# Altium PCB T1_MODIFYV2_0831.PCBDOC (part 2 of 3)
Units mm, origin at the board's own origin, x right, y up, seen from the top; angles counter-clockwise.
Board outline 155.78 x 129.36 mm, 2 copper layers (Top Layer, Bottom Layer); 121 components, 221 nets, 819 pads, 620 vias.
Unrouted connection lines stored in the file: 4.
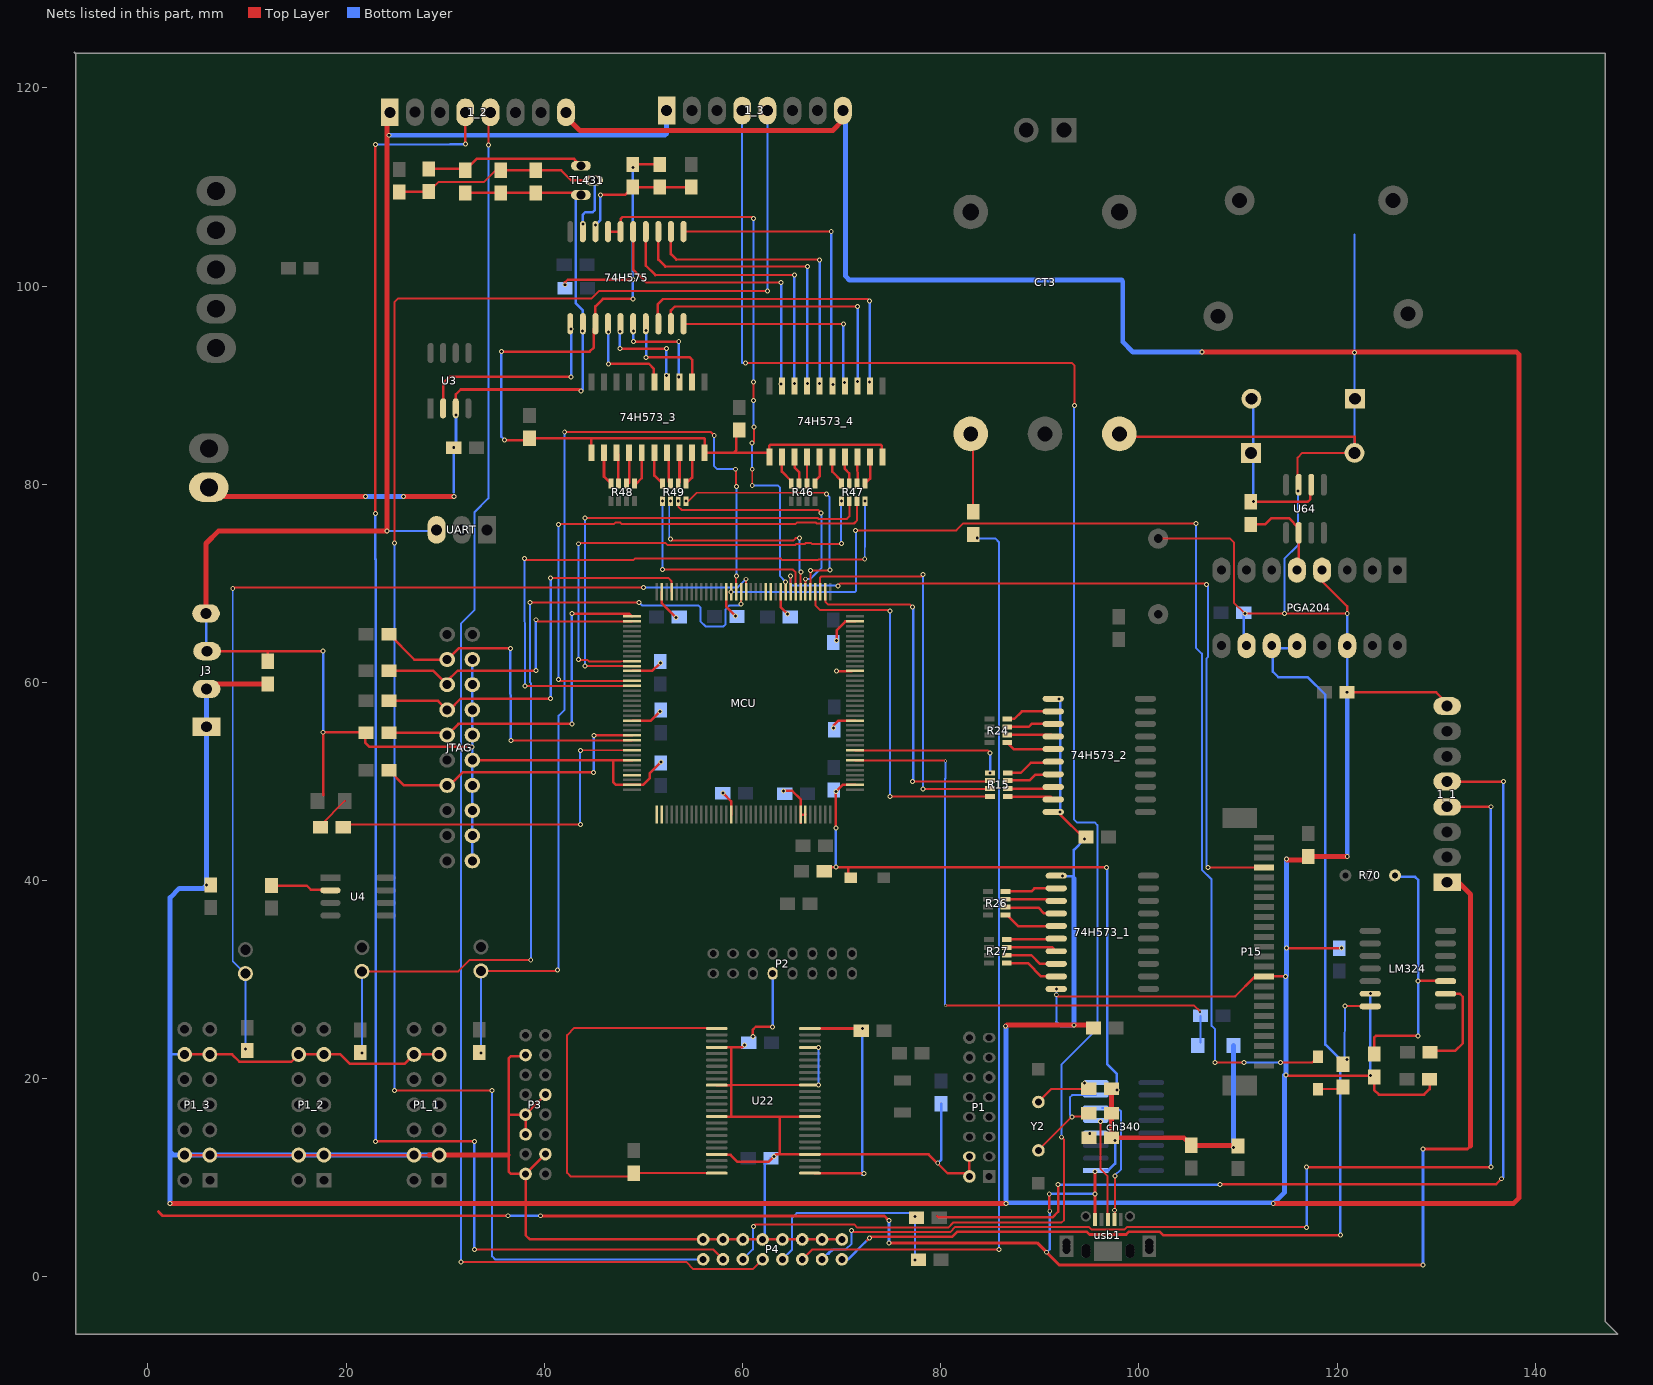
[diagram p2: the nets of this part, all layers, seen from the top]

## Via types
v1: diameter 0.5, hole 0.3, Top Layer to Bottom Layer, 606 vias
v2: diameter 0.3, hole 0.2, Top Layer to Bottom Layer, 14 vias

## Nets (pads, with @x,y where several pads share a name; then routed paths per layer and width w, separated by ;. In a path a pad name is that pad's centre, name@x,y a point inside that pad or via, vN(x,y) a via of type N, cw(c..) or ccw(c..) an arc to the next point about the centre after c; other vN are vias at no path point) (continued)
D4: MCU.118 R47.1 | length 48.4
  Top Layer w0.2: v1(43.434,62.306) 43.51,62.23 43.637,62.23 43.662,62.255 44.375,62.255 44.525,62.105 47.705,62.105 47.732,62.132 48.839,62.132 MCU.118@48.858,62.151 ; v1@43.459,74.016 43.53,74.086 52.225,74.086 52.467,73.843 52.968,73.843 52.971,73.847 65.31,73.847 65.407,73.943 66.257,73.943 66.399,74.086 66.9,74.086 67.043,73.943 69.93,73.943 v1(70.002,74.016)
  Bottom Layer w0.2: v1(43.434,62.306) 43.459,62.332 43.459,73.381 v1(43.459,73.99) ; v1(69.977,78.283) 69.952,78.257 69.952,74.066 v1(70.002,74.016)
D5: MCU.119 R47.2 | length 48.1
  Top Layer w0.2: v1(44.125,61.651) MCU.119@48.858,61.651 ; v1(44.125,76.601) 44.14,76.587 53.463,76.587 53.478,76.601 67.578,76.601 67.695,76.485 70.511,76.485 70.777,76.751 R47.2@70.777,78.283
  Bottom Layer w0.2: v1(44.125,61.651) 44.104,61.672 44.104,76.581 v1(44.125,76.601)
D6: MCU.122 R47.3 | length 55.5
  Top Layer w0.2: v1@41.427,60.151 MCU.122@48.858,60.151 ; v1(41.427,75.946) 41.451,75.97 47.02,75.97 47.17,76.12 47.67,76.12 47.82,75.97 65.333,75.97 65.483,76.12 67.418,76.12 67.507,76.031 70.282,76.031 71.256,76.031 71.577,76.352 R47.3@71.577,78.283
  Bottom Layer w0.2: v1(41.427,60.3) v1(41.427,75.946)
D7: MCU.123 R47.4 | length 64.1
  Top Layer w0.2: v1(37.998,72.492) 38.124,72.366 39.7,72.366 49.008,72.366 49.127,72.486 49.628,72.486 49.632,72.481 63.872,72.481 63.988,72.366 67.636,72.366 67.651,72.381 72.173,72.381 72.188,72.366 v1(72.339,72.441) ; v1(38.075,59.639) 43.967,59.639 48.847,59.639 MCU.123@48.858,59.651
  Bottom Layer w0.2: v1(37.998,72.492) v1(38.075,59.639) ; v1(72.339,72.441) 72.376,74.802 ; 72.377,74.676 v1(72.377,78.283)
D8: MCU.77 R49.4 | length 26.8
  Top Layer w0.2: R49.4@54.46,78.426 v1(54.318,78.283) 54.543,78.283 55.397,79.137 68.336,79.137 v1(68.478,78.994) ; v1(66.853,71.298) v1@66.858,71.298 ; MCU.77@66.858,69.151 v1@66.858,71.298 ; v1@66.858,71.374 v1@66.858,71.298 ; v1@68.809,71.298 v1@66.858,71.298
  Bottom Layer w0.2: v1(68.478,78.994) 68.758,78.715 68.758,78.181 68.758,71.399 v1(68.834,71.323)
D9: MCU.78 R49.3 | length 24.1
  Top Layer w0.2: v1(53.518,78.283) 53.518,77.74 53.864,77.394 67.64,77.394 v1(67.945,77.089) ; MCU.78@66.358,69.151 66.358,70.397 v1(66.37,70.409)
  Bottom Layer w0.2: v1(66.37,70.409) 66.818,70.409 67.369,70.96 67.99,71.581 67.99,77.044 v1(67.945,77.089)
D10: MCU.79 R49.2 | length 22.6
  Top Layer w0.2: v1(52.718,74.447) 52.864,74.301 65.122,74.301 65.37,74.549 v1(65.761,74.549) ; MCU.79@65.858,69.151 65.858,71.116 v1(65.888,71.145)
  Bottom Layer w0.2: v1(52.718,74.447) 52.609,74.556 52.609,78.174 v1(52.718,78.283) ; v1(65.761,74.549) 65.761,71.272 v1(65.888,71.145)
D11: MCU.80 R49.1 | length 22.4
  Top Layer w0.2: v1(51.918,71.374) 65.1,71.374 65.358,71.116 MCU.80@65.358,69.151
  Bottom Layer w0.2: v1(51.918,71.374) 51.918,74.625 v1(51.918,78.283)
D13: 74H575.16 74H575.17 MCU.82 | length 56.6
  Top Layer w0.2: 47.889,106.944 v1@61.112,106.944 ; v1(60.953,84.143) 61.163,84.353 v1(61.163,85.776) ; v1(60.985,79.858) v1(60.985,81.509) ; v1(61.112,88.468) v1(61.112,90.297) ; MCU.82@64.358,69.151 64.358,70.124 v1(64.364,70.129)
  Top Layer w0.254: 74H575.17@46.431,105.488 74H575.16@47.701,105.488 47.701,106.756 47.889,106.944
  Bottom Layer w0.2: v1@60.953,81.541 v1(60.953,84.143) ; v1(60.985,79.858) 63.602,79.858 63.805,79.654 63.805,70.714 v1@64.338,70.18 ; v1@61.112,85.776 v1(61.112,88.468) ; v1(61.112,90.297) v1(61.112,106.832)
D14: MCU.85
D15: MCU.86
D+: ch340.5 usb1.3 | length 9.8
  Top Layer w0.2: v1(96.114,15.697) 96.114,15.035 96.114,14.984 96.114,10.896 96.85,10.16 96.85,9.398 usb1.3@96.85,6.198
D-: ch340.6 usb1.2 | length 13.2
  Top Layer w0.2: usb1.2@97.587,5.852 v1(97.587,10.185)
  Bottom Layer w0.2: ch340.6@96.266,17.043 97.866,17.043 98.216,16.693 98.216,10.871 v1@97.536,10.191
  other v1: 97.526,6.729
DB0: 74H573_4.19 74H575.15 | length 29.6
  Top Layer w0.2: 50.292,100.355 61.697,100.355 v1(63.906,100.355)
  Top Layer w0.254: 74H575.15@48.971,105.488 48.971,101.676 50.292,100.355
  Bottom Layer w0.254: v1(63.906,90.094) 63.906,91.186 63.906,99.314 v1(63.906,100.355)
DB1: 74H573_4.18 74H575.14 | length 29.7
  Top Layer w0.2: 51.206,101.092 63.627,101.092 v1(65.227,101.092)
  Top Layer w0.254: 74H575.14@50.241,105.488 50.241,102.057 51.206,101.092
  Bottom Layer w0.254: v1(65.227,90.17) 65.227,96.723 v1(65.227,101.092)
DB2: 74H573_4.17 74H575.13 | length 30
  Top Layer w0.2: 52.222,101.956 v1(66.548,101.956)
  Top Layer w0.254: 74H575.13@51.511,105.488 51.511,102.667 52.222,101.956
  Bottom Layer w0.254: v1(66.548,90.145) 66.548,100.178 v1(66.548,101.956)
DB3: 74H573_4.16 74H575.12 | length 30
  Top Layer w0.2: 53.34,102.667 67.64,102.667 67.742,102.667 v1(67.793,102.616)
  Top Layer w0.254: 74H575.12@52.781,105.488 52.781,103.226 53.34,102.667
  Bottom Layer w0.254: v1(67.793,90.145) v1(67.793,102.616)
DB4: 74H573_4.15 74H575.11 | length 30.4
  Top Layer w0.2: 74H575.11@54.051,105.488 61.316,105.488 66.345,105.488 v1(68.959,105.488)
  Bottom Layer w0.254: v1(68.959,105.488) 68.959,90.223 v1(69.113,90.068)
DB5: 74H573_4.14 74H575.10 | length 22.1
  Top Layer w0.2: 74H575.10@54.051,96.188 v1(70.18,96.188)
  Bottom Layer w0.254: v1(70.18,96.188) 70.18,90.399 v1(70.307,90.272)
DB6: 74H573_4.13 74H575.9 | length 27.9
  Top Layer w0.2: 53.162,97.917 v1(71.628,97.917)
  Top Layer w0.254: 74H575.9@52.781,96.188 52.781,97.536 53.162,97.917
  Bottom Layer w0.254: v1(71.628,90.373) 71.628,95.91 v1(71.628,97.917)
DB7: 74H573_4.12 74H575.8 | length 31.9
  Top Layer w0.2: 51.968,98.679 72.644,98.679
  Top Layer w0.254: 74H575.8@51.511,96.188 51.46,96.239 51.46,98.171 51.968,98.679 ; 72.644,98.679 v1(72.822,98.501)
  Bottom Layer w0.254: v1(72.822,90.297) 72.822,94.818 72.822,97.434 v1(72.822,98.501)
DB8: 74H573_3.12 74H575.7 | length 9.7
  Top Layer w0.254: v1(50.267,92.786) 54.686,92.786 54.915,92.558 74H573_3.12@54.915,90.316
  Bottom Layer w0.254: v1(50.267,92.786) v1(50.267,95.529)
DB9: 74H573_3.13 74H575.6 | length 9.2
  Top Layer w0.254: v1(48.997,94.386) v1(53.569,94.386)
  Bottom Layer w0.254: v1(48.997,94.386) v1(48.997,95.453) ; v1(53.569,90.805) 53.569,93.32 53.569,93.523 53.569,93.701 v1(53.569,94.386)
DB10: 74H573_3.14 74H575.5 | length 9.2
  Top Layer w0.254: v1(47.625,93.675) 50.927,93.675 v1(52.324,93.675)
  Bottom Layer w0.254: v1(47.625,93.675) v1(47.625,95.428) ; v1(52.324,90.957) v1(52.324,93.675)
DB11: 74H573_3.15 74H575.4 | length 9.6
  Top Layer w0.254: v1(46.457,92.151) 50.546,92.151 51.029,91.669 51.029,90.316 74H573_3.15@51.029,90.087
  Bottom Layer w0.254: v1(46.457,92.151) v1(46.457,95.377)
DGND: 74H573_3.1 74H573_3.10 74H573_4.1 74H573_4.10 74H575.3 C13.2 C14.2 C39.1 C63.1 R78.1 | length 95
  Top Layer w0.254: v1(35.662,93.37) 44.577,93.37 45.009,93.802 74H575.3@45.009,95.682 ; v1(35.992,84.455) C39.1@38.481,84.455 ; C39.1@38.506,84.633 44.602,84.633 ; v1(42.088,100.127) 42.088,100.355 42.367,100.635 v1(48.971,100.635) ; 74H573_3.1@44.755,83.166 44.755,84.48 44.602,84.633 ; 74H575.3@45.161,96.188 45.161,97.942 45.923,98.704 v1(48.946,98.704) ; C14.2@48.946,112.268 C13.2@51.664,112.268 ; 58.833,83.166 60.477,83.166 61.316,83.166 62.586,83.166 62.713,83.292 62.713,83.896 62.807,83.991 73.932,83.991 74.052,83.871 74.052,82.85 74H573_4.10@74.143,82.76 ; 59.385,84.531 59.385,84.938 59.385,83.439 59.112,83.166 74H573_3.10@56.185,83.166 56.185,84.607 56.159,84.633 44.602,84.633
  Bottom Layer w0.254: v1(35.662,93.37) 35.662,84.785 v1(35.992,84.455) ; v1(48.946,98.704) v1(48.946,111.963)
EXTG5: Led1.2 MCU.90 R21.1 | length 100.4
  Top Layer w0.2: v1(8.56,69.494) 8.656,69.59 v1(50.007,69.59) ; v1(60.35,70.409) 60.358,70.401 MCU.90@60.358,69.151
  Bottom Layer w0.2: v1(8.56,69.494) 8.56,31.877 Led1.2@9.83,30.607 v1(9.83,23.012) ; v1(50.007,69.59) 59.532,69.59 v1(60.35,70.409)
EXTG6: Led2.2 MCU.91 R22.1 | length 87.7
  Top Layer w0.2: Led2.2@21.59,30.836 31.321,30.836 32.488,32.002 v1(38.632,32.002) ; v1(38.537,68.052) v1(49.575,68.052) ; v1(59.858,67.92) MCU.91@59.858,68.59
  Bottom Layer w0.2: v1(21.59,22.581) 21.59,27.534 ; 21.59,27.305 21.59,27.534 ; Led2.2@21.59,30.836 21.59,27.534 ; v1(38.537,68.052) 38.537,60.031 38.679,59.889 38.679,49.809 38.679,32.639 v1@38.679,32.049 ; v1(49.575,68.052) 49.86,67.767 55.575,67.767 ; 55.575,67.742 55.759,67.558 55.759,66.169 56.267,65.661 58.084,65.661 58.291,65.868 58.291,67.377 58.656,67.742 59.68,67.742 v1(59.858,67.92)
EXTG7: Led3.2 MCU.92 R29.1 | length 103.3
  Top Layer w0.2: Led3.2@33.604,30.886 v1@41.351,30.886 ; v1(42.062,85.268) 56.794,85.268 v1(57.15,84.912) ; MCU.92@59.358,69.151 59.358,70.661 v1(59.411,70.714) ; v1@59.36,79.807 v1@59.36,81.432
  Bottom Layer w0.2: v1(33.604,22.581) 33.604,27.94 33.604,29.82 Led3.2@33.604,30.886 ; v1@41.453,31.09 41.453,38.684 41.453,56.642 42.062,57.252 v1(42.062,85.268) ; v1(57.15,84.912) 57.15,81.813 57.455,81.509 v1(59.284,81.509) ; v1(59.411,70.714) 59.411,71.73 v1@59.411,79.756
  other v1: 41.351,30.988 59.385,79.781
EXTG8: D17.2 MCU.93 | length 119.3
  Top Layer w0.2: v1(71.425,75.336) 81.588,75.336 82.298,76.046 v1(105.789,76.046) ; v1(107.696,21.641) v1(110.617,21.641) ; v1(114.3,21.641) 117.5,21.641 D17.2@118.085,22.225
  Bottom Layer w0.2: v1(58.826,69.113) 71.349,69.113 71.45,69.215 71.45,75.311 v1(71.425,75.336) ; v1(105.789,76.046) 105.789,63.453 106.353,62.89 106.353,62.187 106.366,62.173 106.366,41.732 106.353,41.719 106.353,41.09 107.339,40.105 107.339,25.338 107.696,24.981 v1(107.696,21.641) ; v1(110.617,21.641) v1(114.3,21.641)
GND: 1_1.1 1_2.1 1_3.1 C3.1 C4.1 C5.1 C6.1 C7.1 C8.1 C9.1 C10.1 C10uf.2 C11.1 C12.1 C35.1 C36.1 C45.2 C46.2 C47.1 C48.1 ch340.1 D3.1 D5.1 J3.3 J3.4 JTAG.4 JTAG.6 JTAG.8 JTAG.10 JTAG.12 JTAG.14 JTAG.16 JTAG.18 JTAG.20 MCU.16 MCU.30 MCU.31 MCU.38 MCU.51 MCU.61 MCU.71 MCU.83 MCU.94 MCU.107 MCU.120 MCU.130 MCU.138 MCU.143 R5.1 R28.1 UART.3 usb1.5 | length 510.9
  Top Layer w0.2: 1_2.1@24.13,117.348 1_2.1@24.536,117.754
  Top Layer w0.254: J3.3@5.969,63.144 12.116,63.144 ; R28.1@12.116,62.154 12.116,63.144 ; 17.678,48.625 v1(17.678,54.966) R5.1@21.971,54.966 ; v1(17.678,63.144) 12.116,63.144 ; R5.1@21.946,55.143 21.946,53.899 22.352,53.492 v1(32.715,53.492) ; JTAG.12@32.741,52.146 32.745,52.151 MCU.138@48.858,52.151 ; 46.939,52.151 46.939,49.962 47.244,49.657 ; 47.263,49.651 49.956,49.651 50.648,50.343 50.648,50.851 v1(51.765,51.968) ; MCU.130@48.858,56.151 50.766,56.151 v1(51.689,57.074) ; MCU.120@48.858,61.151 50.889,61.151 v1(51.714,61.976) ; MCU.107@51.858,69.151 51.858,67.979 v1(53.289,66.548) ; v1(58.014,48.819) 58.039,48.819 58.857,48.001 ; MCU.94@58.358,69.151 58.358,67.651 v1(59.309,66.7) ; MCU.16@58.858,46.651 58.858,47.974 ; MCU.83@63.858,69.151 63.858,67.587 v1(64.541,66.904) ; v1(64.16,49.047) 65.024,49.047 65.858,48.213 MCU.30@65.858,45.847 ; MCU.30@65.858,46.651 MCU.31@66.358,46.651 ; C12.1@68.326,41.326 70.663,41.326 ; v1(69.19,55.397) 69.19,55.651 69.689,56.151 MCU.51@71.358,56.151 ; v1(69.418,45.314) v1(69.418,48.971) 70.098,49.651 MCU.38@71.358,49.651 ; v1(69.469,61.138) MCU.61@71.044,61.138 ; v1(69.494,64.237) 69.494,65.253 70.393,66.151 MCU.71@71.358,66.151 ; D5.1@70.663,40.259 70.663,41.326 ; v1(90.957,8.382) 90.957,6.68 v1(91.008,6.629) ; usb1.5@95.576,5.791 usb1.5@95.645,5.722 ; usb1.5@95.576,6.071 v1(95.576,8.382) v1(95.576,10.622) ; v1(96.749,41.326) 70.663,41.326 ; 1_1.1@131.445,39.776 1_1.1@132.309,39.776
  Top Layer w0.3: 1.067,6.579 1.469,6.177 v1@36.271,6.172 ; v1@39.624,6.147 74.32,6.147 v1(74.765,5.702) ; v1(74.765,3.442) 89.742,3.442 91.997,1.187 v1(128.67,1.187) ; v1(128.67,12.91) 133.179,12.91 133.477,13.208
  Top Layer w0.5: J3.4@5.867,66.954 5.867,74.016 7.137,75.286 v1(24.13,75.286) 24.13,82.017 1_2.1@24.13,117.348 ; C47.1@97.231,18.974 97.257,18.948 C46.2@97.257,14.046 104.546,14.046 C45.2@105.308,13.284 C10uf.2@109.931,13.284 ; 1_1.1@132.309,39.776 133.477,38.608 133.477,13.208
  Bottom Layer w0.2: v1@24.36,75.286 25.629,75.286 UART.3@29.032,75.286 ; 1_3.1@52.349,117.704 1_3.1@52.349,117.958
  Bottom Layer w0.254: J3.3@5.867,63.246 J3.4@5.867,66.954 ; v1(17.678,54.966) v1(17.678,63.144) ; JTAG.20@32.741,41.986 JTAG.4@32.741,62.306 ; v1(69.418,41.351) v1(69.418,45.314) ; v1(90.703,2.489) 91.008,2.794 v1(91.008,6.629) ; v1(90.957,8.382) v1(95.576,8.382) ; ch340.1@96.545,10.77 96.952,10.77 97.612,11.43 v1(97.612,13.767) ; v1@96.799,41.326 96.799,21.488 97.79,20.498 v1(97.79,18.872)
  Bottom Layer w0.3: v1(36.322,6.172) v1(39.599,6.172) ; v1(74.765,3.442) v1(74.765,5.702) ; v1(128.67,1.187) v1(128.67,12.91)
  Bottom Layer w0.5: v1(24.308,115.214) 42.113,115.214 52.172,115.214 52.349,115.392 1_3.1@52.349,117.704 ; v1(109.55,13.081) D3.1@109.55,23.368
GND_D1: 1_1.8 1_2.8 1_3.8 74H573_1.1 74H573_1.10 74H573_2.1 74H573_2.10 74H575.2 "Sing GND.1" C15.2 C16.2 C17.1 C33.1 C34.1 C37.2 C38.2 C40.1 C41.1 C49.1 C50.1 C51.2 CT3.1 D8.2 D9.1 J3.1 J3.2 LM324.13 P1.2 P1.4 P1_1.3 P1_1.4 P1_1.11 P1_1.12 P1_2.3 P1_2.4 P1_2.11 P1_2.12 P1_3.3 P1_3.4 P1_3.11 P1_3.12 P2.26 P3.35 P3.40 P3.41 P3.43 P3.46 P3.47 P4.50 P4.52 P4.54 P4.56 P4.58 P4.60 P4.62 P4.64 P15.15 PGA204.4 PGA204.10 PGA204.14 R28.2 R40.1 R71.2 R75.2 Rr15.2 TL431.3 U3.3 U22.4 U22.10 U22.15 U22.21 U22.28 U22.34 U22.39 U22.45 U64.3 | length 1026.2
  Top Layer w0.2: 58.89,19.296 58.949,19.355 U22.15@66.37,19.355 ; v1@91.821,28.321 109.728,28.321 ; 101.956,74.498 109.22,74.498 109.599,74.119 109.599,68.045 110.69,66.954 v1(110.719,66.954) 114.071,66.954 ; 114.071,66.929 v1@121.006,66.929 ; U64.3@116.027,80.493 116.027,82.677 116.51,83.16 D9.1@121.765,83.16
  Top Layer w0.254: P1_3.4@3.708,12.294 28.346,12.294 ; P1_3.12@3.708,22.454 8.504,22.454 9.24,21.717 14.478,21.717 P1_2.12@15.215,22.454 19.431,22.454 20.396,21.488 25.883,21.488 P1_1.12@26.848,22.454 P1_1.11@29.388,22.454 ; U3.3@31.064,87.655 31.064,89.052 31.568,89.556 40.462,89.556 43.54,89.556 v1(43.688,89.408) ; R75.2@32.029,109.398 C16.2@35.585,109.398 C15.2@39.141,109.398 43.488,109.398 TL431.3@43.688,109.198 ; 36.398,16.434 36.444,16.388 P3.41@38.11,16.388 P3.40@40.11,18.388 ; P3.43@38.11,14.388 P3.41@38.11,16.388 ; P3.35@38.11,22.388 37.998,22.276 36.652,22.276 36.398,22.022 36.398,10.643 36.653,10.388 P3.47@38.11,10.388 ; P3.46@40.11,12.388 P3.47@38.11,10.388 38.11,7.391 38.11,4.207 38.538,3.778 P4.50@56.032,3.778 P4.52@58.032,3.778 P4.54@60.032,3.778 P4.56@62.032,3.778 P4.58@64.032,3.778 P4.60@66.032,3.778 P4.62@68.032,3.778 P4.64@70.032,3.778 ; U22.39@57.404,16.18 58.826,16.18 U22.10@66.802,16.18 ; U22.34@57.404,19.355 58.852,19.355 58.89,19.317 58.89,16.243 ; U22.28@57.404,23.165 59.969,23.165 v1(60.198,23.393) ; U22.45@58.115,12.319 58.801,12.319 59.512,11.608 62.611,11.608 63.373,12.37 78.791,12.37 80.696,10.465 82.57,10.465 P1.2@82.896,10.138 P1.4@82.896,12.138 ; 58.89,19.296 58.89,23.165 ; v1(61.062,24.257) 61.052,24.267 61.052,24.959 61.337,25.244 v1(63.048,25.242) v1(63.048,25.242) ; 63.754,12.37 63.754,16.154 64.262,16.18 ; 74H573_2.10@91.338,46.787 91.948,46.787 v1(94.539,44.196) ; v1(91.667,28.475) v1@91.821,28.321 ; CT3.1@98.388,84.768 121.765,84.768 121.765,84.252 D9.1@121.765,83.16 ; 109.728,28.321 P15.15@111.684,30.277 ; P15.15@112.632,30.319 v1(114.808,30.319) ; v1(114.884,33.172) v1(120.447,33.172) ; v1@114.96,20.32 123.647,20.32 R71.2@123.673,20.295 ; PGA204.4@118.491,71.323 118.491,70.206 121.031,67.666 v1(121.031,66.929) ; v1(121.006,59.004) 129.997,59.004 1_1.8@131.445,57.556 ; C33.1@121.006,59.233 C33.1@121.183,59.055 ; R71.2@123.749,20.193 123.749,18.872 124.231,18.39 128.778,18.39 129.337,18.948 C50.1@129.337,19.939
  Top Layer w0.3: CT3.1@98.247,84.909 CT3.1@98.388,84.768
  Top Layer w0.5: v1(2.235,7.391) 7.366,7.391 8.433,7.391 38.11,7.391 v1(86.614,7.391) ; J3.2@5.918,59.334 6.426,59.842 R28.2@12.09,59.842 ; 6.147,79.68 7.061,78.765 16.993,78.765 ; 17.28,78.765 16.993,78.765 ; v1(21.971,78.765) 16.993,78.765 ; v1(25.806,78.765) v1(30.886,78.765) ; 28.346,12.319 36.347,12.319 ; 1_2.8@42.189,117.526 42.189,117.094 43.586,115.697 69.113,115.697 70.129,116.713 1_3.8@70.129,117.704 ; v1(86.563,25.298) 86.69,25.425 C41.1@95.123,25.425 ; v1(106.375,93.32) 138.125,93.32 138.379,93.066 138.379,7.976 137.795,7.391 v1(113.563,7.391) ; v1@114.96,42.088 C51.2@117.094,42.088 ; C51.2@117.094,42.443 v1(121.031,42.443)
  Bottom Layer w0.2: v1(67.666,19.355) v1(67.666,23.165) ; 91.667,25.757 v1(91.667,28.475) v1@91.667,28.903 ; v1(114.681,66.954) 114.681,72.466 116.078,73.863 v1(116.078,79.299) ; D9.1@121.765,83.16 v1(121.765,93.294) 121.765,105.207
  Bottom Layer w0.254: 2.235,22.581 2.362,22.454 P1_3.12@3.708,22.454 ; 30.861,79.172 v1(30.861,83.693) 31.09,83.922 v1(31.09,86.995) ; v1(43.688,89.408) 43.866,89.586 v1(43.866,95.479) 43.866,97.561 43.155,98.273 43.155,108.664 43.659,109.169 TL431.3@43.688,109.198 ; P4.56@62.032,3.778 62.23,3.976 62.23,5.156 62.23,8.128 62.23,11.328 C37.2@62.865,11.963 ; v1(63.048,25.242) P2.26@63.048,30.627 ; v1(79.705,11.481) 80.035,11.811 R40.1@80.035,17.475 ; 91.667,25.757 92.126,25.298 v1@93.447,25.298 ; v1(91.923,58.344) 92.05,58.217 92.05,46.965 v1(92.024,46.939) ; v1@92.329,40.411 93.243,40.411 93.447,40.208 93.447,43.104 v1(94.539,44.196) ; C34.1@110.592,67.005 110.592,63.983 PGA204.10@110.871,63.703 ; C49.1@120.244,33.172 v1(120.447,33.172) ; 121.031,58.725 PGA204.14@121.031,63.703 v1(121.031,66.929) ; v1(123.368,20.32) v1(123.368,28.6)
  Bottom Layer w0.3: 1_3.8@70.129,117.704 1_3.8@70.129,117.958 ; v1@114.681,20.396 v1@114.859,20.574
  Bottom Layer w0.5: v1(2.235,7.391) 2.235,12.649 ; 2.235,21.133 2.235,21.768 ; J3.2@5.918,59.334 J3.1@5.918,55.524 v1(5.918,39.548) 5.588,39.218 3.175,39.218 2.235,38.278 2.235,22.581 2.235,21.768 ; v1(21.971,78.765) v1(25.806,78.765) ; P1_1.3@29.388,12.294 P1_1.4@26.848,12.294 P1_2.3@17.755,12.294 P1_2.4@15.215,12.294 P1_3.3@6.248,12.294 P1_3.4@3.708,12.294 2.591,12.294 2.235,12.649 ; 1_3.8@70.129,117.704 70.409,117.424 70.409,100.99 70.79,100.609 98.247,100.609 98.374,100.482 98.374,94.361 99.416,93.32 v1(106.375,93.32) ; v1@86.604,25.258 v1(86.614,7.391) 86.706,7.483 113.472,7.483 v1(113.563,7.391) 114.681,8.509 v1@114.681,20.371 ; v1(93.447,25.4) 93.447,40.208 ; v1@114.859,20.574 v1@114.859,30.319 ; v1@114.884,30.395 v1(114.884,33.172) v1(114.884,42.164) ; v1(121.031,42.443) 121.031,58.725 ; 2.235,12.649 2.235,14.929 2.235,19.488 2.235,21.768
  other v1: 63.17,12.167 114.859,20.371 91.667,29.058 92.278,40.462
GPB13: MCU.74 R15.2 | length 35.5
  Top Layer w0.2: MCU.74@68.358,69.151 68.358,68.116 68.605,67.869 76.886,67.869 v1(77.165,67.589) ; v1(77.165,50.013) R15.2@84.925,50.013
  Top Layer w0.254: R15.2@84.925,50.013 R15.2@84.988,50.076
  Bottom Layer w0.254: v1(77.165,50.013) 77.212,50.059 77.212,67.543 v1(77.165,67.589)
GPB14: MCU.75 R15.3 | length 40.3
  Top Layer w0.2: MCU.75@67.858,69.151 67.839,69.17 67.839,70.582 67.964,70.707 70.314,70.707 ; 70.381,70.707 78.073,70.707 v1(78.232,70.866) ; v1(78.232,49.225) 84.937,49.225 R15.3@84.988,49.276
  Bottom Layer w0.2: v1(78.232,49.225) 78.232,56.159 78.232,56.54 78.232,69.571 v1(78.232,70.866)
GPB15: MCU.76 R15.4 | length 38
  Top Layer w0.2: MCU.76@67.358,69.151 67.358,67.77 67.818,67.31 74.803,67.31 v1(74.905,67.208) ; v1@74.905,48.476 R15.4@84.988,48.476
  Bottom Layer w0.2: v1(74.905,48.463) 74.905,53.442 74.905,54.839 74.905,55.626 v1(74.905,67.208)
GPC5: MCU.45 R15.1 | length 15.7
  Top Layer w0.2: MCU.45@71.358,53.151 71.377,53.132 84.739,53.132 v1(84.988,52.883)
  Bottom Layer w0.254: v1(84.988,50.876) v1(84.988,52.883)
GPE0: MCU.141
GPE2: MCU.1
GPE3: MCU.2
IN1_2: P4.59
IN1_3: 1_2.4 P4.51 | length 159.8
  Top Layer w0.2: v1@32.94,2.767 35.484,2.767 57.043,2.767 P4.51@58.032,1.778
  Top Layer w0.254: v1(22.962,77.038) v1(22.962,114.275) ; v1(22.983,13.687) v1(32.94,13.687) ; v1(32.029,114.325) 32.029,115.799 1_2.4@32.029,117.526
  Bottom Layer w0.2: P4.51@58.032,1.778 P4.51@58.522,1.778
  Bottom Layer w0.254: v1@22.962,13.665 v1(22.983,13.687) 22.983,72.419 22.962,72.441 v1(22.962,77.038) ; v1(22.962,114.275) 30.528,114.317 v1(32.029,114.325) ; v1(32.94,2.769) 32.94,8.001 v1(32.94,13.687)
IN1_4: 1_2.5 P4.55 | length 148.4
  Top Layer w0.2: v1(31.599,1.526) 54.307,1.526 55.043,0.789 61.043,0.789 P4.55@62.032,1.778 ; v1(34.366,114.224) 34.366,117.323 1_2.5@34.569,117.526
  Bottom Layer w0.2: v1(31.599,1.526) 31.599,22.428 31.599,65.95 32.945,67.296 32.945,77.141 34.366,78.562 v1(34.366,114.224)
IN1_5: 1_3.4 P4.53 | length 184.5
  Top Layer w0.2: v1(60.3,92.253) 93.243,92.253 93.497,91.999 v1@93.497,88.011 ; v1(61.112,5.105) 61.313,5.306 71.272,5.306 71.598,4.98 72.369,4.98 72.384,4.995 73.26,4.995 73.275,4.98 80.766,4.98 81.293,5.507 92.217,5.507 92.45,5.74 92.45,13.849 v1(92.202,14.097)
  Bottom Layer w0.2: 1_3.4@59.969,117.704 59.969,108.433 59.969,92.253 v1(60.3,92.253) ; P4.53@60.032,1.778 61.043,2.789 61.043,5.036 v1(61.112,5.105) ; v1(92.202,14.097) 92.202,21.447 95.809,25.054 95.809,45.593 95.529,45.872 93.751,45.872 93.447,46.177 v1@93.447,87.935
  other v1: 93.497,87.935
IN1_6: 1_3.5 P4.49 | length 185.6
  Top Layer w0.2: v1(24.867,18.821) 24.878,18.81 v1(34.734,18.81) ; v1(24.867,74.066) 24.867,82.321 ; 24.867,80.594 24.867,82.321 ; v1(62.509,99.517) 45.548,99.517 44.786,98.755 25.248,98.755 24.867,98.374 24.867,82.321
  Bottom Layer w0.2: v1(24.867,18.821) v1(24.867,74.066) ; v1(34.734,18.81) 34.734,16.002 34.734,2.071 35.027,1.778 P4.49@56.032,1.778 ; v1(62.509,99.517) 1_3.5@62.509,117.704
IN1_7: 1_1.4 P4.61 | length 117.6
  Top Layer w0.2: v1@71.021,4.735 71.231,4.526 72.557,4.526 72.572,4.541 73.072,4.541 73.087,4.526 75.286,4.526 80.954,4.526 81.481,5.053 94.938,5.053 95.229,4.762 98.522,4.762 98.813,5.053 116.892,5.053 v1(116.942,5.004)
  Top Layer w0.254: v1(116.942,11.074) v1(135.534,11.074) ; 1_1.4@131.115,47.447 v1(135.534,47.447)
  Bottom Layer w0.2: P4.61@68.032,1.778 68.573,2.319 ; 69.043,2.789 68.573,2.319 ; v1(71.021,4.702) 71.021,3.368 70.442,2.789 69.196,2.789 68.726,2.319 68.573,2.319
  Bottom Layer w0.254: v1(116.942,5.004) v1(116.942,11.074) ; v1(135.534,11.074) 135.534,12.116 v1(135.534,47.447)
IN1_8: P4.57 Sing.2 V_8.2 | length 21.9
  Bottom Layer w0.2: P4.57@64.032,1.778 65.021,2.767 65.021,5.992 65.456,6.426 77.419,6.426 v1(77.419,1.727)
  other v1: 77.419,6.096
IN_8: 1_1.5 | length 106.1
  Top Layer w0.254: 79.654,6.147 79.803,5.998 91.27,5.998 91.846,6.575 v1(91.846,9.322) ; v1@108.128,9.373 136.068,9.373 v1(136.601,9.906) ; 1_1.5@131.115,49.987 v1(136.779,49.987)
  Bottom Layer w0.254: v1(91.846,9.322) v1(108.179,9.322) ; v1(136.601,9.906) 136.779,10.084 v1(136.779,49.987)
IN_CHA: P4.63 PGA204.11 PGA204.12 | length 118.9
  Top Layer w0.254: P4.63@69.799,1.778 P4.63@70.032,1.778 ; 72.568,3.683 72.93,4.045 81.154,4.045 81.681,4.572 94.739,4.572 95.03,4.281 98.721,4.281 99.012,4.572 102.095,4.572 102.451,4.216 v1(120.345,4.216)
  Bottom Layer w0.254: P4.63@70.032,1.778 70.663,1.778 72.39,3.505 v1(72.822,3.937) ; 114.249,60.503 117.069,60.503 118.821,58.75 118.821,23.45 120.345,21.926 v1(120.345,4.216) ; 114.275,60.528 114.071,60.528 113.513,61.087 113.513,63.449 PGA204.12@116.18,63.449
IN_IA1: PGA204.5 R16.2 U64.6 | length 9.6
  Top Layer w0.254: R16.2@111.305,75.946 112.751,75.946 113.381,76.577 115.141,76.577 116.129,75.589 U64.6@116.129,75.096 ; PGA204.5@116.129,71.145 U64.6@116.129,74.727
IN_IB: R13.2 | length 94
  Top Layer w0.2: 66.032,1.778 67.023,2.769 v1(85.885,2.769)
  Bottom Layer w0.2: v1(83.693,74.574) 83.769,74.498 85.547,74.498 85.885,74.16 v1(85.885,2.769)
JTCK: JTAG.9 MCU.109 R5.2 | length 36.4
  Top Layer w0.254: R5.2@24.308,54.915 29.972,54.915 JTAG.9@30.201,54.686 31.332,55.817 v1(42.787,55.817) v1@42.824,55.855 ; v1(42.787,66.941) 48.568,66.941 MCU.109@48.858,66.651
  Bottom Layer w0.254: v1(42.787,55.817) 42.787,56.794 42.787,63.119 42.787,65.253 v1(42.787,66.941)
JTDI: JTAG.5 MCU.110 R4.2 | length 31.1
  Top Layer w0.2: v1@39.279,66.192 39.313,66.158 48.851,66.158 MCU.110@48.858,66.151
  Top Layer w0.254: R4.2@24.308,61.163 28.804,61.163 JTAG.5@30.201,59.766 30.201,60.122 31.254,61.175 39.103,61.175 v1(39.141,61.214) ; v1(39.141,66.319) 39.152,66.319 v1@39.279,66.192
  Bottom Layer w0.254: v1(39.141,61.214) 39.12,61.235 39.12,66.298 v1(39.141,66.319)
JTDO: JTAG.13 MCU.133 R7.2 | length 29.5
  Top Layer w0.254: R7.2@24.308,51.13 25.832,49.606 JTAG.13@30.201,49.606 30.441,49.606 31.787,50.952 44.933,50.952 v1(44.958,50.927) ; v1@45.019,54.651 MCU.133@48.858,54.651
  Bottom Layer w0.254: v1(44.958,50.927) 44.983,50.927 45.009,50.952 45.009,52.553 v1(45.009,54.661)
JTMS: JTAG.7 MCU.105 R6.2 | length 42.8
  Top Layer w0.2: v1(40.628,70.536) 48.057,70.536 52.501,70.536 52.858,70.178 MCU.105@52.858,69.151
  Top Layer w0.254: R6.2@24.308,58.141 29.286,58.141 JTAG.7@30.201,57.226 30.441,57.226 31.572,58.357 v1(40.628,58.357)
  Bottom Layer w0.254: v1(40.628,58.357) 40.628,63.322 40.628,63.602 v1(40.628,70.536)
JTRST: JTAG.3 MCU.134 R3.2 | length 35.3
  Top Layer w0.2: v1@36.627,54.151 MCU.134@48.858,54.151
  Top Layer w0.254: R3.2@24.308,64.872 26.873,62.306 30.226,62.306 31.357,63.437 v1(36.576,63.424)
  Bottom Layer w0.254: v1(36.576,63.424) v1(36.627,54.127)
LCS: MCU.81 P15.4 | length 79.1
  Top Layer w0.2: MCU.81@64.858,69.151 v1(64.858,70.752) ; v1@69.748,69.748 v1(69.621,69.748) 69.87,69.997 106.686,69.997 v1(106.807,69.875) ; v1(106.978,41.319) P15.4@112.632,41.319
  Bottom Layer w0.2: v1(64.858,70.752) 64.858,69.94 64.999,69.799 v1@69.621,69.799 ; v1(106.807,69.875) 106.97,69.712 106.97,62.538 106.807,62.375 106.82,62.362 106.82,41.544 106.807,41.531 106.807,41.49 v1(106.978,41.319)
MOSI: D3.2 MCU.43 R50.2 | length 62.5
  Top Layer w0.2: MCU.43@71.358,52.151 71.377,52.132 v2@80.467,52.132 ; v2(80.493,27.407) 84.176,27.407 105.562,27.407 106.172,26.797 v2(106.172,26.746)
  Bottom Layer w0.2: v2(80.467,52.07) 80.512,52.025 80.512,50.349 80.451,50.288 80.451,27.449 v2(80.493,27.407) ; D3.2@106.223,23.641 R50.2@106.223,26.34
Net74H573_1_2: 74H573_1.2 R26.8 | length 5.3
  Top Layer w0.254: R26.8@86.538,38.913 89.154,38.913 89.459,39.218 74H573_1.2@91.667,39.218
Net74H573_1_3: 74H573_1.3 R26.7 | length 5.2
  Top Layer w0.254: R26.7@86.538,38.113 91.502,38.113 74H573_1.3@91.667,37.948
Net74H573_1_4: 74H573_1.4 R26.6 | length 5.4
  Top Layer w0.254: R26.6@86.538,37.313 86.584,37.267 89.86,37.267 90.449,36.678 74H573_1.4@91.667,36.678
Net74H573_1_5: 74H573_1.5 R26.5 | length 5.7
  Top Layer w0.254: R26.5@86.538,36.513 86.83,36.513 86.855,36.487 86.855,36.36 87.808,35.408 88.824,35.408 74H573_1.5@91.667,35.408
Net74H573_1_6: 74H573_1.6 R27.8 | length 4.9
  Top Layer w0.254: R27.8@86.665,34.061 74H573_1.6@91.591,34.061
Net74H573_1_7: 74H573_1.7 R27.7 | length 5.2
  Top Layer w0.254: R27.7@86.665,33.261 91.273,33.261 74H573_1.7@91.667,32.868
Net74H573_1_8: 74H573_1.8 R27.6 | length 5.4
  Top Layer w0.254: R27.6@86.665,32.461 89.154,32.461 90.018,31.598 74H573_1.8@91.667,31.598
Net74H573_1_9: 74H573_1.9 R27.5 | length 5.6
  Top Layer w0.254: R27.5@86.665,31.661 88.811,31.661 90.145,30.328 74H573_1.9@91.667,30.328
Net74H573_2_2: 74H573_2.2 R24.8 | length 5
  Top Layer w0.254: R24.8@86.716,56.312 87.427,56.312 88.189,57.074 74H573_2.2@91.362,57.074
Net74H573_2_3: 74H573_2.3 R24.7 | length 4.8
  Top Layer w0.254: R24.7@86.716,55.512 88.887,55.512 89.179,55.804 74H573_2.3@91.362,55.804
Net74H573_2_4: 74H573_2.4 R24.6 | length 4.7
  Top Layer w0.254: R24.6@86.716,54.712 91.184,54.712 74H573_2.4@91.362,54.534
Net74H573_2_5: 74H573_2.5 R24.5 | length 4.9
  Top Layer w0.254: R24.5@86.716,53.912 87.364,53.264 74H573_2.5@91.362,53.264
Net74H573_2_6: 74H573_2.6 R15.8 | length 4.9
  Top Layer w0.254: R15.8@86.766,50.876 88.087,50.876 89.103,51.892 74H573_2.6@91.26,51.892
Net74H573_2_7: 74H573_2.7 R15.7 | length 4.9
  Top Layer w0.254: R15.7@86.766,50.076 86.825,50.135 88.997,50.135 89.535,50.673 91.311,50.673 74H573_2.7@91.362,50.724
Net74H573_2_8: 74H573_2.8 R15.6 | length 4.7
  Top Layer w0.254: R15.6@86.766,49.276 91.184,49.276 74H573_2.8@91.362,49.454
Net74H573_2_9: 74H573_2.9 R15.5 | length 4.7
  Top Layer w0.254: R15.5@86.766,48.476 88.57,48.476 91.07,48.476 74H573_2.9@91.362,48.184
Net74H573_3_2: 74H573_3.2 R48.8 | length 3.5
  Top Layer w0.254: 74H573_3.2@46.025,83.166 46.025,80.772 46.177,80.62 R48.8@46.812,79.985
Net74H573_3_3: 74H573_3.3 R48.7 | length 3.3
  Top Layer w0.254: 74H573_3.3@47.295,83.166 47.473,82.988 47.473,80.124 R48.7@47.612,79.985
Net74H573_3_4: 74H573_3.4 R48.6 | length 3.2
  Top Layer w0.254: R48.6@48.412,79.985 48.565,80.137 74H573_3.4@48.565,83.166
Net74H573_3_5: 74H573_3.5 R48.5 | length 3.4
  Top Layer w0.254: R48.5@49.212,79.985 49.835,80.607 74H573_3.5@49.835,83.166
Net74H573_3_6: 74H573_3.6 R49.8 | length 3.4
  Top Layer w0.254: 74H573_3.6@51.105,83.166 51.105,80.874 R49.8@51.918,80.061
Net74H573_3_7: 74H573_3.7 R49.7 | length 3
  Top Layer w0.254: 74H573_3.7@52.375,83.166 52.549,82.992 R49.7@52.549,80.23
Net74H573_3_8: 74H573_3.8 R49.6 | length 3.2
  Top Layer w0.254: R49.6@53.518,80.061 53.645,80.188 74H573_3.8@53.645,83.166
Net74H573_3_9: 74H573_3.9 R49.5 | length 3.4
  Top Layer w0.254: R49.5@54.318,80.061 54.915,80.658 74H573_3.9@54.915,83.166
Net74H573_4_2: 74H573_4.2 R46.8 | length 2.9
  Top Layer w0.254: 74H573_4.2@63.983,82.76 63.983,81.28 R46.8@64.973,80.289
Net74H573_4_3: 74H573_4.3 R46.7 | length 2.9
  Top Layer w0.254: 74H573_4.3@65.253,82.76 65.253,81.686 65.722,81.217 R46.7@65.722,80.061
Net74H573_4_4: 74H573_4.4 R46.6 | length 2.7
  Top Layer w0.2: R46.6@66.522,80.061 74H573_4.4@66.523,82.76
Net74H573_4_5: 74H573_4.5 R46.5 | length 2.6
  Top Layer w0.254: R46.5@67.361,80.366 67.793,80.797 74H573_4.5@67.793,82.76
Net74H573_4_6: 74H573_4.6 R47.8 | length 2.8
  Top Layer w0.254: 74H573_4.6@69.063,82.76 69.063,81.28 R47.8@70.002,80.34
Net74H573_4_7: 74H573_4.7 R47.7 | length 2.9
  Top Layer w0.254: 74H573_4.7@70.333,82.76 70.333,81.534 70.777,81.09 R47.7@70.777,80.061
Net74H573_4_8: 74H573_4.8 R47.6 | length 3
  Top Layer w0.254: 74H573_4.8@71.603,82.76 R47.6@71.628,79.756
Net74H573_4_9: 74H573_4.9 R47.5 | length 2.9
  Top Layer w0.254: R47.5@72.377,80.061 72.873,80.556 72.873,81.229 74H573_4.9@72.873,82.76
Net74H575_1: 74H575.1 U3.2 | length 20.5
  Top Layer w0.254: U3.2@29.794,87.655 29.794,90.17 30.455,90.83 v1(42.697,90.83)
  Bottom Layer w0.254: v1(42.697,90.83) v1(42.697,95.682)
Net74H575_18: 74H575.18 C13.1 C14.1 R12.2 | length 13.5
  Top Layer w0.254: 74H575.18@45.161,105.488 74H575.18@45.161,106.197 ; v1(45.669,109.195) 48.158,109.195 C14.1@48.946,109.982 C13.1@51.664,109.982 R12.2@54.839,109.982
  Bottom Layer w0.254: v1(45.161,106.147) 45.669,106.655 v1(45.669,109.195)
Net74H575_19: 74H575.19 C15.1 C16.1 R23.2 R25.1 TL431.2 | length 26.3
  Top Layer w0.2: R25.1@28.346,109.525 29.335,110.514 33.933,110.514 35.103,111.684 C16.1@35.585,111.684
  Top Layer w0.254: R23.2@25.4,109.525 27.178,109.525 R25.1@28.346,109.525 ; C16.1@35.585,111.684 C15.1@39.141,111.684 41.707,111.684 42.723,110.668 TL431.2@44.976,110.668
  Bottom Layer w0.254: v1(43.891,106.248) 43.891,107.213 44.129,107.451 44.891,107.451 45.069,107.629 45.069,108.788 45.069,109.372 45.069,110.575 TL431.2@44.976,110.668
NetC46_1: C46.1 ch340.4
  other v1: 95.047,14.478
NetC47_2: C47.2 ch340.8 Y2.1 | length 5.6
  Top Layer w0.2: Y2.1@89.865,17.653 91.186,18.974 C47.2@94.945,18.974
  other v1: 94.539,19.558
NetC48_2: C48.2 ch340.7 Y2.2 | length 11.3
  Top Layer w0.2: Y2.2@89.865,12.773 92.026,14.934 93.297,16.205 C48.2@94.971,16.205
  Bottom Layer w0.2: v1(93.269,16.154) 93.04,16.383 93.04,18.11 93.269,18.339 ch340.7@95.656,18.339
NetCT2_1: D8.1 D9.2 R16.1 U64.2 | length 17.6
  Top Layer w0.254: R16.1@111.023,78.232 R16.1@111.305,78.514 ; R16.1@111.305,78.232 117.069,78.232 117.297,78.461 U64.2@117.297,79.375
  Bottom Layer w0.254: v1(111.557,78.232) D8.1@111.557,88.42
NetCT2_3: 
NetCT3_2: CT3.2 R13.1 | length 7.6
  Top Layer w0.2: R13.1@83.287,77.216 83.287,84.667 CT3.2@83.388,84.768
NetD17_1: D17.1 R72.2 | length 2.7
  Top Layer w0.2: D17.1@118.364,18.974 R72.2@121.031,18.974
NetLED4_A: R76.2 | length 3.7
  Top Layer w0.2: R76.2@17.424,45.39 17.424,45.602 19.866,48.044
NetLM324_2: LM324.2 R80.1 | length 10.5
  Top Layer w0.254: R80.1@129.388,22.835 131.953,22.835 132.69,23.571 132.69,23.774 132.69,28.27 132.359,28.6 LM324.2@130.622,28.6
NetLM324_3: LM324.3 R70.2 R71.1 | length 26.8
  Top Layer w0.254: R71.1@123.749,22.479 123.749,24.155 123.927,24.333 v1(128.194,24.333) ; v1(128.194,29.87) LM324.3@130.622,29.87
  Bottom Layer w0.254: R70.2@125.908,40.361 127.889,40.361 128.194,40.056 v1(128.194,24.333)
NetLM324_14: LM324.14 R72.1 | length 8.2
  Top Layer w0.2: v1(120.802,27.33) LM324.14@123.479,27.33
  Bottom Layer w0.2: v1(120.802,27.33) 120.777,22.174 v1(121.006,21.946)
NetMCU_136: MCU.136 R76.1 | length 36.8
  Top Layer w0.2: R76.1@19.978,45.657 v1(43.676,45.657) ; v1(43.637,53.137) 43.651,53.151 MCU.136@48.858,53.151
  Top Layer w0.254: R76.1@19.71,45.39 R76.1@19.978,45.657
  Bottom Layer w0.2: v1(43.637,53.137) 43.612,53.111 43.612,45.721 v1(43.676,45.657)
NetR17_1: R17.1 U22.1 U22.24 | length 24.9
  Top Layer w0.254: U22.24@66.802,25.07 R17.1@71.958,25.07 ; U22.1@67.31,10.439 v1(72.263,10.439)
  Bottom Layer w0.254: v1@72.111,10.312 v1(72.111,25.07)
NetR18_1: R18.1 U22.25 U22.48 | length 45
  Top Layer w0.2: R18.1@48.692,10.465 R18.1@49.022,10.465 ; U22.48@57.404,10.465 R18.1@49.022,10.465 ; U22.25@57.404,25.07 57.346,25.128 43.035,25.128 42.297,24.39 42.297,10.51 42.672,10.135 44.374,10.135 48.692,10.135 R18.1@49.022,10.465
NetR25_2: R25.2 R75.1 TL431.1 | length 16
  Top Layer w0.254: R25.2@28.346,111.811 30.099,111.811 R75.1@31.902,111.811 ; R75.1@32.029,111.684 33.172,112.827 42.999,112.827 TL431.1@43.688,112.138
NetRr16_2: Rr16.2 U4.2 | length 6.1
  Top Layer w0.254: Rr16.2@12.471,39.497 16.027,39.497 16.434,39.091 18.339,39.091 U4.2@18.415,39.014